# Altium PCB PCB1.PcbDoc
Units mm, origin at the board's own origin, x right, y up, seen from the top; angles counter-clockwise.
Board outline 85 x 56 mm, 4 copper layers (Top Layer, GND, +3V3, Bottom Layer), stack 0.568 mm thick; 80 components, 57 nets, 316 pads, 13 vias.
Unrouted connection lines stored in the file: 178.
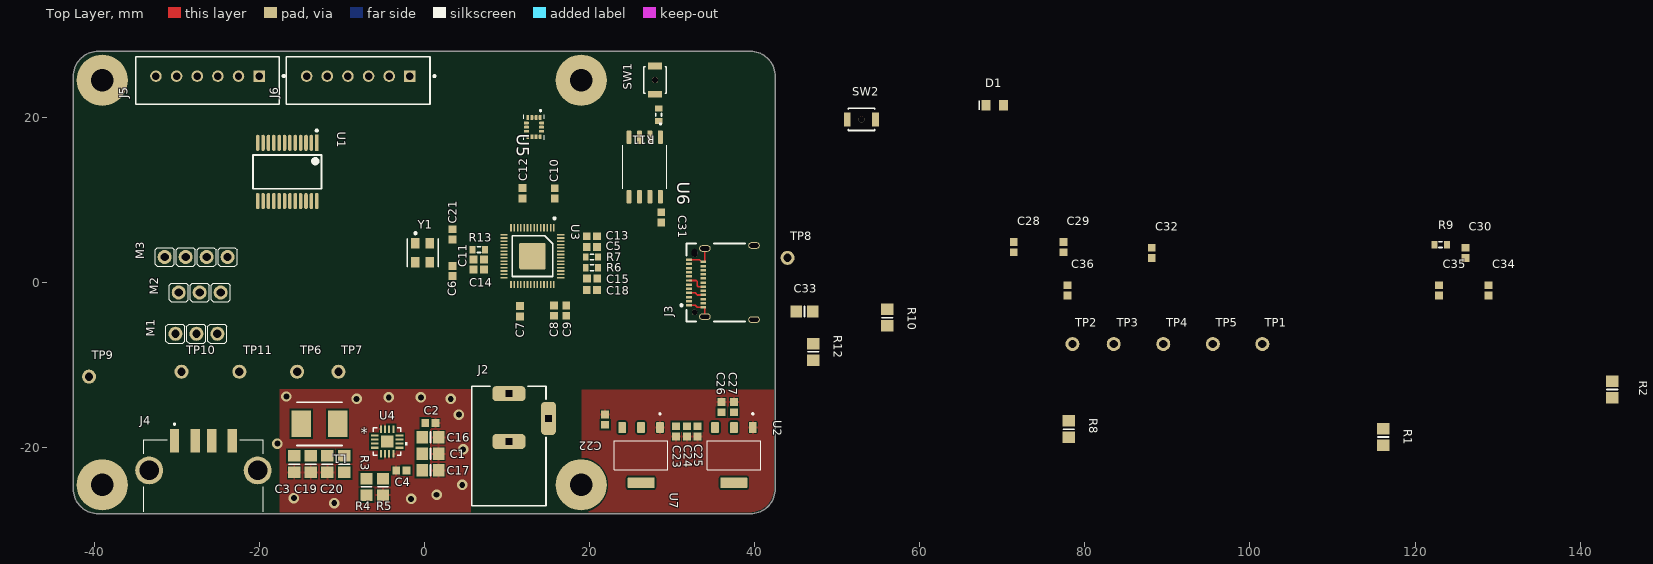
[diagram p0: Top Layer view]
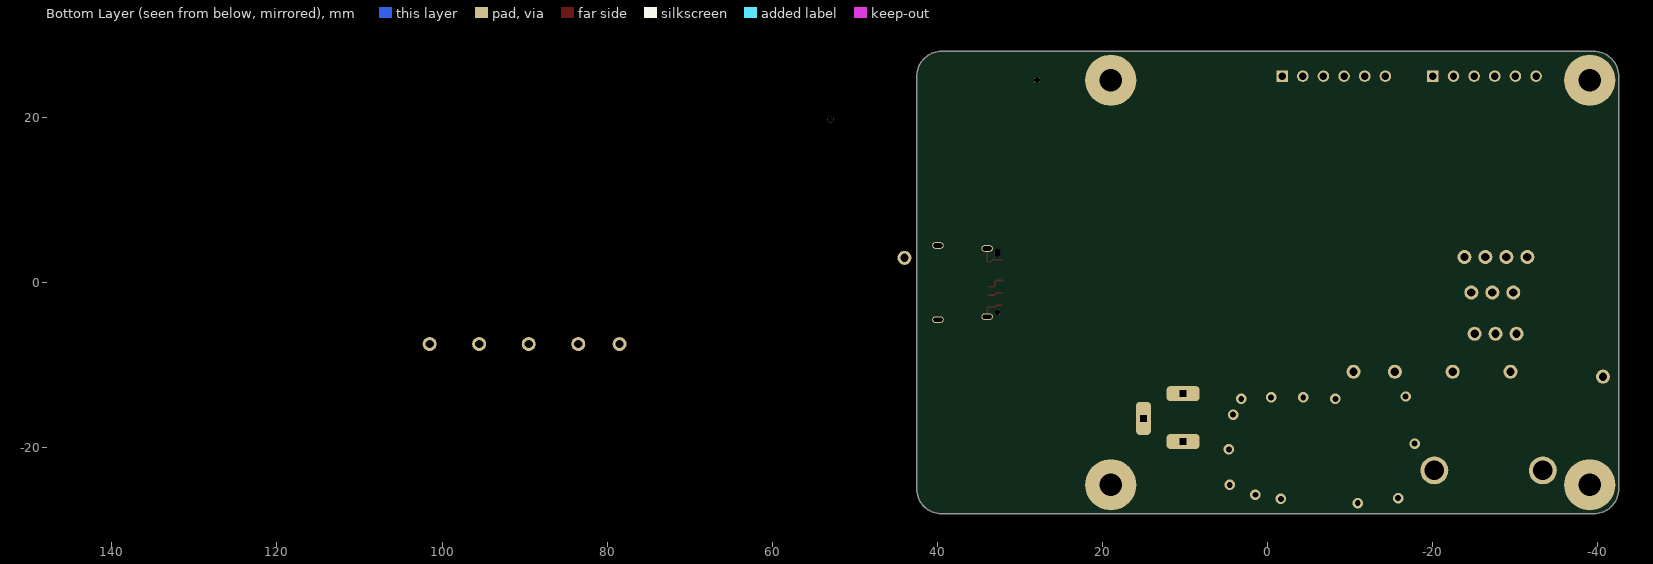
[diagram p1: Bottom Layer view, seen from below]
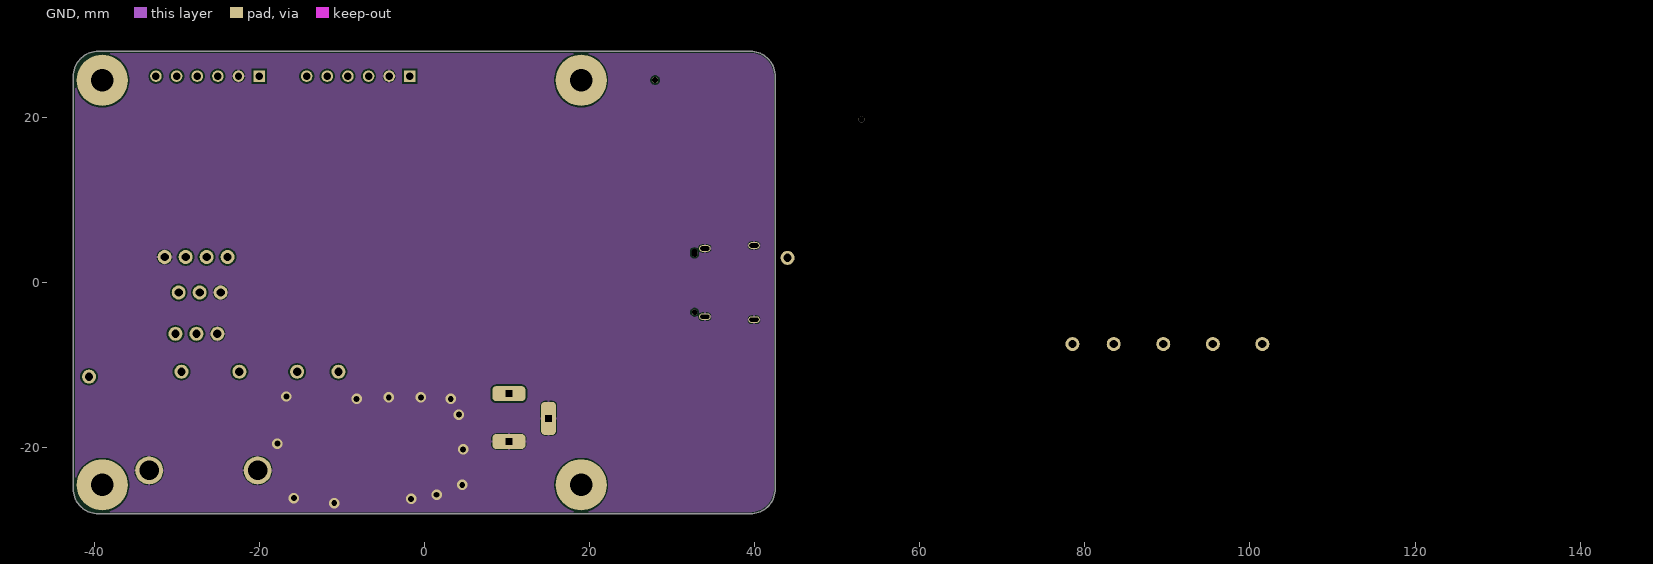
[diagram p2: GND]
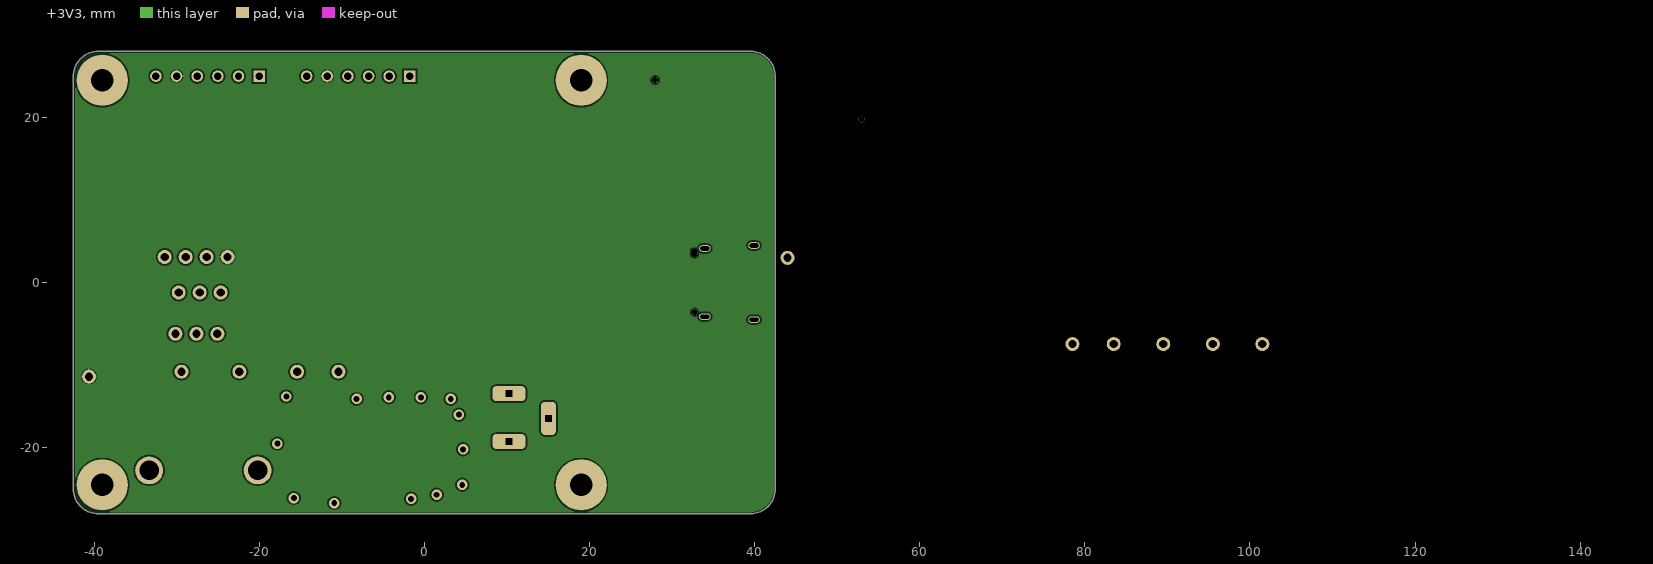
[diagram p3: +3V3]

## Layer stack, top to bottom
Top Solder: solder mask 0.0102, Solder Resist, Dk 3.5
Top Layer: signal copper 0.0356
Dielectric 2: prepreg 0.0711, PP-006, Dk 4.1
GND: signal copper 0.0175
Dielectric 1: dielectric 0.32, FR-4, Dk 4.8
+3V3: signal copper 0.0175
Dielectric 3: prepreg 0.0711, PP-006, Dk 4.1
Bottom Layer: signal copper 0.0356
Bottom Solder: solder mask 0.0102, Solder Resist, Dk 3.5

## Board outline
-42.5,-25 -42.5,25 cw(c-39.5,25) -39.5,28 39.5,28 cw(c39.5,25) 42.5,25 42.5,-25 cw(c39.5,-25) 39.5,-28 -39.5,-28 cw(c-39.5,-25)

## Design rules (kind name [scope] priority, off if disabled: settings)
BoardOutlineClearance [All] p1: gap=0.2 ignorepadtopadclearanceinfootprint=FALSE
Clearance [All] p1: gap=0.2 ignorepadtopadclearanceinfootprint=TRUE except(0: Arc-Text Arc-Hole Track-Text Track-Hole SMDPad-Text SMDPad-Hole THPad-Text THPad-Hole Via-Text Via-Hole Fill-Text Fill-Hole Poly-Text Poly-Hole Region-Text Region-Hole Text-Text Text-Hole; 0.1: Arc-Arc Arc-Track Track-Track)
DiffPairsRouting [All] p1: maxlimit=0.254 minlimit=0.254 mostfreqgap=0.254 toplayer_minwidth=0.381 toplayer_maxwidth=0.381 toplayer_prefwidth=0.381 midlayer1_minwidth=0.381 midlayer1_maxwidth=0.381 midlayer1_prefwidth=0.381 midlayer2_minwidth=0.381 midlayer2_maxwidth=0.381 midlayer2_prefwidth=0.381 bottomlayer_minwidth=0.381 bottomlayer_maxwidth=0.381 bottomlayer_prefwidth=0.381 maxuncoupledlength=12.7
HoleSize [All] p1: absolutevalues=TRUE maxlimit=6.3 minlimit=0.3 maxpercent=80.000 minpercent=20.000
MinimumAnnularRing [All] p1: minimumring=0.13
MinimumSolderMaskSliver [All] p1: minsoldermaskwidth=0.098
PolygonConnect "PTH-M3 Connect" [All vs HasFootprint('PTH-M3')] p1: connectstyle=Direct reliefconductorwidth=0.254 reliefentries=4 polygonreliefangle="90 Angle" airgapwidth=0.254
PolygonConnect [All] p2: thpad.connectstyle=Relief thpad.reliefconductorwidth=0.3 thpad.reliefentries=4 thpad.polygonreliefangle="90 Angle" thpad.airgapwidth=0.1 smdpad.connectstyle=Relief smdpad.reliefconductorwidth=0.3 smdpad.reliefentries=4 smdpad.polygonreliefangle="90 Angle" smdpad.airgapwidth=0.1 via.connectstyle=Direct via.reliefconductorwidth=0.254 via.reliefentries=4 via.polygonreliefangle="90 Angle" via.airgapwidth=0.254
RoomDefinition "board schematic" [InComponentClass('board schematic')] p1: confinementstyle=ConfineIn formatcopy=TRUE lockcomponents=FALSE outline -57,-28 561,-28 561,35 -57,35
RoutingVias [All] p1: holewidth=0.3 width=0.6 viastyle="Through Hole" minholewidth=0.3 minwidth=0.45 maxholewidth=6.35 maxwidth=3
SilkToSilkClearance [All] p1: silktosilkclearance=0.1
SilkToSolderMaskClearance [IsPad] p1: minsilkscreentomaskgap=0 clearancetoexposedcopper=TRUE
SolderMaskExpansion "Tent Vias" [IsVia] p1: expansion=0.102 istentingtop=TRUE
SolderMaskExpansion [All] p2: expansion=0.038 istentingtop=FALSE
Width PowerNets [InNetClass('PowerNets')] p1: maxlimit=0.5 minlimit=0.2 preferedwidth=0.2 minimp=50.000000 maximp=50.000000 favimp=50.000000
Width [All] p2: maxlimit=2 minlimit=0.1 preferedwidth=0.2 minimp=50.000000 maximp=50.000000 favimp=50.000000
25 further rules are at their usual default settings.

## Classes and differential pairs
differential pair USB_D: +USB_D_P -USB_D_N

## Components (designator, comment, footprint, x,y, rotation, side; value= is the part's Value field where it differs from the comment)
C1 "10u L" 6-0805_M 0.75,-20.75 r180 top
C2 "0.1u" "CAP 0603" 0.75,-17 r180 top
C3 "47u" 6-0805_M -15.75,-22 r90 top
C4 "0.1u" "CAP 0603" -2.775,-22.75 r180 top
C5 "0.1u" "CAP 0603" 20.3,4.3 r180 top
C6 "15p" "CAP 0603" 3.4,1.4 r90 top
C7 "0.1u" "CAP 0603" 11.6,-3.475 r90 top
C8 "0.1u" "CAP 0603" 15.7,-3.4 r90 top
C9 "0.1u" "CAP 0603" 17.2,-3.4 r90 top
C10 "0.1u" "CAP 0603" 15.8,10.8 r270 top
C11 "0.1u" "CAP 0603" 6.6,2.8 r0 top
C12 "0.1u" "CAP 0603" 11.9,10.825 r270 top
C13 "0.1u" "CAP 0603" 20.3,5.6 r180 top
C14 "0.1u" "CAP 0603" 6.6,1.6 r0 top
C15 "1u" "CAP 0603" 20.325,0.5 r180 top
C16 "10u L" 6-0805_M 0.75,-18.75 r180 top
C17 "10u L" 6-0805_M 0.75,-22.75 r180 top
C18 "1u" "CAP 0603" 20.3,-0.9 r180 top
C19 "47u" 6-0805_M -13.75,-22 r90 top
C20 "47u" 6-0805_M -11.75,-22 r90 top
C21 "15p" "CAP 0603" 3.4,5.825 r270 top
C22 "10u" "CAP 0603" 21.9,-16.6 r270 top
C23 "10u" "CAP 0603" 30.5,-18.025 r90 top
C24 "10u" "CAP 0603" 31.8,-18.025 r90 top
C25 "10u" "CAP 0603" 33.1,-18.025 r90 top
C26 "10u" "CAP 0603" 36,-15.075 r270 top
C27 "10u" "CAP 0603" 37.5,-15.075 r270 top
C28 "0.1u" "CAP 0603" 71.4,4.3 r90 top
C29 "10u" "CAP 0603" 77.4,4.3 r90 top
C30 "0.1u" "CAP 0603" 126.1,3.6 r90 top
C31 "0.1u" "CAP 0603" 28.7,7.9 r270 top
C32 "0.1u" "CAP 0603" 88.1,3.6 r90 top
C33 "10u L" 6-0805_M 46.05,-3.5 r180 top
C34 "2.2u" "CAP 0603" 128.9,-0.95 r90 top
C35 "0.1u" "CAP 0603" 122.9,-0.95 r90 top
C36 "10u" "CAP 0603" 77.9,-0.95 r90 top
D1 "150080VS75000" WL-SMCW_0805_150080xx75000 69.1,21.475 r0 top
J2 "Barrel jack" 694106301002 10.25,-19.8 r0 top
J3 "YS" FP-12401610E4#2A-MFG 37.1,0 r90 top
J4 "USB A" AMPHENOL_87583-2010RPLF -26.75,-22.75 r0 top
J5 "B6B-XH-A(LF)(SN)" FP-B6B-XH-A_LF_SN-MFG -26.25,24.475 r180 top
J6 "B6B-XH-A(LF)(SN)" FP-B6B-XH-A_LF_SN-MFG -8,24.475 r180 top
L1 "2.2uH" INDPM5552X300N -12.7,-17.1 r180 top
M1 "Servo1" "3 PIN THT" -25.06,-6.2 r180 top
M2 "Servo2" "3 PIN THT" -24.66,-1.2 r180 top
M3 "Sonic" "4 PIN THT - DUPLICATE" -23.82,3.1 r180 top
R1 "5k1" 6-0805_M 116.15,-18.7 r90 top
R2 "5k1" 6-0805_M 143.9,-12.95 r90 top
R3 "100k" 6-0805_M -9.7,-22 r90 top
R4 "270k" 6-0805_M -7,-24.75 r90 top
R5 "51k" 6-0805_M -5,-24.75 r90 top
R6 "27.4" J1-0603 20.3,1.8 r0 top
R7 "27.4" J1-0603 20.3,3.1 r0 top
R8 "270k" 6-0805_M 78.05,-17.75 r90 top
R9 "1k" J1-0603 123.1,4.6 r0 top
R10 "51k" 6-0805_M 56.05,-4.25 r90 top
R11 "1k" J1-0603 28.375,20.325 r270 top
R12 "51k" 6-0805_M 47.1,-8.4 r90 top
R13 "1k" J1-0603 6.6,4 r0 top
SW1 "B3U-1000P-B" FP-B3U-1000P-B-MFG 27.95,24.525 r90 top
SW2 "B3U-1000P-B" FP-B3U-1000P-B-MFG 52.95,19.775 r0 top
TP1 "TP" "TP THROUGH" 101.5,-7.45 r0 top
TP2 "TP" "TP THROUGH" 78.5,-7.45 r90 top
TP3 "TP" "TP THROUGH" 83.5,-7.45 r90 top
TP4 "TP" "TP THROUGH" 89.5,-7.45 r90 top
TP5 "TP" "TP THROUGH" 95.5,-7.45 r90 top
TP6 "TP" "TP THROUGH" -15.4,-10.8 r90 top
TP7 "TP" "TP THROUGH" -10.4,-10.8 r90 top
TP8 "TP" "TP THROUGH" 44,3 r90 top
TP9 "TP" "TP THROUGH" -40.6,-11.4 r90 top
TP10 "TP" "TP THROUGH" -29.4,-10.8 r90 top
TP11 "TP" "TP THROUGH" -22.4,-10.8 r90 top
U1 "TB6612FNG,C,8,EL" FP-SSOP24-P-300-0_65A-IPC_A -16.6,13.4 r270 top
U2 "AMS11173v3" SOT229P700X180-4N 37.5,-20.9 r270 top
U3 "RP2040" QFN-56-GP 13.1,3.2 r270 top
U4 "BD9D300MUV-E2" VQFN16_BD9D300_ROM-M -4.5,-19.251 r0 top
U5 "ICM-42688-P" PQFN50P300X250X97-14N 13.285,18.825 r270 top
U6 "W25Q128JVSIQ" SOIC127P790X216-8N 26.7,14 r270 top
U7 "AMS1117 5V" SOT229P700X180-4N 26.25,-20.9 r270 top
Y1 "ABM8-12.000MHZ-B2-T" FP-ABM8-MFG -0.2,3.6 r270 top

## Footprints (in the part's own frame and the unit in brackets; to place one, negate y for a bottom-side part, rotate by r counter-clockwise, add the part's x,y. Pads: shape width x height; smd on the part's side, far side on the other; paste and mask are expansions set on the pad)
"3 PIN THT" [mm] "3 pin servo"
  round 1.7 hole 1 paste-1000 mask+0: 1(0,0) 2(2.54,0) 3(5.08,0)
  silkscreen extent -1.14,-1.14 6.22,1.14
"4 PIN THT - DUPLICATE" [mm] "4 pin THT"
  round 1.7 hole 1 paste-1000 mask+0: 1(0,0) 2(2.54,0) 3(5.08,0) 4(7.62,0)
  silkscreen extent -1.14,-1.14 8.76,1.14
6-0805_M [mm] "Chip Resistor, Body 2.0x1.2mm, IPC Low Density"
  rect 1.4x1.5 smd: 1(-1,0) 2(1,0)
  silkscreen extent 0,-0.65 0,0.65, body extent -1.07,-0.7 1.07,0.7, height 0.7
694106301002 [mm] "DC Power Jack Right Angled(6.4)"
  rrect50% 4x1.8 hole 0.8 square: 1(0,6.35) 2(0,0.55)
  rrect50% 1.8x4 hole 0.8 square: 3(4.8,3.35)
  silkscreen extent -4.5,-7.25 4.5,7.25, body extent -4.5,-7.25 5,7.25, height 10.75
AMPHENOL_87583-2010RPLF [mm]
  rect 1.12x2.88 smd: 01(-3.5,3.58) 02(-1,3.58) 03(1,3.58) 04(3.5,3.58)
  round 3.376 hole 2.36: S1(-6.57,0) S2(6.57,0)
  silkscreen extent -7.25,-5 7.25,5.7, body extent -7.25,-10.28 7.25,4.6, height 7.74
"CAP 0603" [mm] "Chip Capacitor, 2-Leads, Body 1.70x0.90mm, IPC Medium Density"
  rect 0.95x0.95 smd: 1(-0.625,0) 2(0.625,0)
  body extent -0.85,-0.45 0.85,0.45, height 0.9
FP-12401610E4#2A-MFG [mm]
  rrect100% 0.8x1.4 hole 1.1 slot 0.5 at 0 deg paste-1000 mask+0: 1(-4.13,3.115) 2(4.13,3.115) 3(-4.49,-2.835) 4(4.49,-2.835)
  rect 0.3x0.7 smd paste+0 mask+0: A1(-2.75,5.025) A2(-2.25,5.025) A3(-1.75,5.025) A4(-1.25,5.025) A5(-0.75,5.025) A6(-0.25,5.025) A7(0.25,5.025) A8(0.75,5.025) A9(1.25,5.025) A10(1.75,5.025) A11(2.25,5.025) A12(2.75,5.025) B1(2.5,3.325) B2(2,3.325) B3(1.5,3.325) B4(1,3.325) B5(0.5,3.325) B6(0,3.325) B7(-0.5,3.325) B8(-1,3.325) B9(-1.5,3.325) B10(-2,3.325) B11(-2.5,3.325) B12(-3,3.325)
  round 0.65 hole 0.65 unplated paste-1000 mask+0: ""(-3.6,4.365)
  rrect100% 0.95x0.65 hole 0.65 slot 0.95 at 0 deg unplated paste-1000 mask+0: ""(3.6,4.365)
  silkscreen extent -4.72,-1.76 4.72,6.09, body extent -4.99,-5.45 4.99,5.48, height 0.25
FP-ABM8-MFG [mm]
  rect 1.3x1.05 smd paste+0 mask+0: 1(-1.15,-0.875) 2(1.15,-0.875) 3(1.15,0.875) 4(-1.15,0.875)
  silkscreen extent -2.5,-1.88 1.7,1.88, body extent -1.9,-1.5 1.9,1.5, height 0.25
FP-B3U-1000P-B-MFG [mm]
  rect 0.8x1.7 smd paste+0 mask+0: 1(-1.7,0) 2(1.7,0)
  round 0.75 hole 0.75 unplated paste-1000 mask+0: ""(0,0)
  silkscreen extent -1.6,-1.35 1.6,1.35, body extent -2.2,-1.45 2.2,1.45, height 0.25
FP-B6B-XH-A_LF_SN-MFG [mm]
  rect 1.4x1.4 hole 0.9 paste-1000 mask+0: 1(-6.25,-0.525)
  round 1.4 hole 0.9 paste-1000 mask+0: 2(-3.75,-0.525) 3(-1.25,-0.525) 4(1.25,-0.525) 5(3.75,-0.525) 6(6.25,-0.525)
  silkscreen extent -9.35,-2.88 8.7,2.88, body extent -8.8,-2.98 8.8,2.98, height 0.25
FP-SSOP24-P-300-0_65A-IPC_A [mm]
  rect 1.954x0.432 smd paste+0 mask+0: 1(-3.525,3.575)
  rrect100% 1.954x0.432 smd paste+0 mask+0: 2(-3.525,2.925) 3(-3.525,2.275) 4(-3.525,1.625) 5(-3.525,0.975) 6(-3.525,0.325) 7(-3.525,-0.325) 8(-3.525,-0.975) 9(-3.525,-1.625) 10(-3.525,-2.275) 11(-3.525,-2.925) 12(-3.525,-3.575) 13(3.525,-3.575) 14(3.525,-2.925) 15(3.525,-2.275) 16(3.525,-1.625) 17(3.525,-0.975) 18(3.525,-0.325) 19(3.525,0.325) 20(3.525,0.975) 21(3.525,1.625) 22(3.525,2.275) 23(3.525,2.925) 24(3.525,3.575)
  silkscreen extent -5.13,-4.15 2.05,4.15, body extent -5,-4.65 5,4.65, height 0.25
INDPM5552X300N [mm]
  rect 2.35x3.2 smd: 1(-2.2,0) 2(2.2,0)
  silkscreen extent -2.75,-2.63 2.75,2.63
J1-0603 [mm] "Chip Resistor, Body 1.6x0.8mm, IPC High Density"
  rect 0.7x0.9 smd: 1(-0.75,0) 2(0.75,0)
  silkscreen extent -0.2,-0.35 0.2,0.35, body extent -0.85,-0.48 0.85,0.48, height 0.9
PQFN50P300X250X97-14N [mm]
  rrect50% 0.59x0.35 smd mask+0: 1(-1.165,0.75) 2(-1.165,0.25) 3(-1.165,-0.25) 4(-1.165,-0.75) 8(1.165,-0.75) 9(1.165,-0.25) 10(1.165,0.25) 11(1.165,0.75)
  rrect50% 0.35x0.59 smd mask+0: 5(-0.5,-0.915) 6(0,-0.915) 7(0.5,-0.915) 12(0.5,0.915) 13(0,0.915) 14(-0.5,0.915)
  silkscreen extent -2.1,-1.25 1.5,1.25, body extent -1.5,-1.25 1.5,1.25, height 0.98
QFN-56-GP [mm]
  rect 0.875x0.2 smd mask+0.05: 1(-3.437,2.6) 2(-3.437,2.2) 3(-3.437,1.8) 4(-3.437,1.4) 5(-3.437,1) 6(-3.437,0.6) 7(-3.437,0.2) 8(-3.437,-0.2) 9(-3.437,-0.6) 10(-3.437,-1) 11(-3.437,-1.4) 12(-3.437,-1.8) 13(-3.437,-2.2) 14(-3.437,-2.6) 29(3.437,-2.6) 30(3.437,-2.2) 31(3.437,-1.8) 32(3.437,-1.4) 33(3.437,-1) 34(3.437,-0.6) 35(3.437,-0.2) 36(3.437,0.2) 37(3.437,0.6) 38(3.437,1) 39(3.437,1.4) 40(3.437,1.8) 41(3.437,2.2) 42(3.437,2.6)
  rect 0.2x0.875 smd mask+0.05: 15(-2.6,-3.437) 16(-2.2,-3.437) 17(-1.8,-3.437) 18(-1.4,-3.437) 19(-1,-3.437) 20(-0.6,-3.437) 21(-0.2,-3.437) 22(0.2,-3.437) 23(0.6,-3.437) 24(1,-3.437) 25(1.4,-3.437) 26(1.8,-3.437) 27(2.2,-3.437) 28(2.6,-3.437) 43(2.6,3.437) 44(2.2,3.437) 45(1.8,3.437) 46(1.4,3.437) 47(1,3.437) 48(0.6,3.437) 49(0.2,3.437) 50(-0.2,3.437) 51(-0.6,3.437) 52(-1,3.437) 53(-1.4,3.437) 54(-1.8,3.437) 55(-2.2,3.437) 56(-2.6,3.437)
  rrect10% 3.2x3.2 smd paste-1000 mask+0: 57(0,0)
  silkscreen extent -4.7,-2.46 2.46,2.79, body extent -3.52,-3.52 3.52,3.52, height 0.91
SOIC127P790X216-8N [mm]
  rrect25% 1.61x0.58 smd: 1(-3.605,1.905) 2(-3.605,0.635) 3(-3.605,-0.635) 4(-3.605,-1.905) 5(3.605,-1.905) 6(3.605,-0.635) 7(3.605,0.635) 8(3.605,1.905)
  silkscreen extent -5.31,-2.64 2.64,2.64, body extent -3.95,-2.64 3.95,2.64, height 1.92
SOT229P700X180-4N [mm]
  rrect15% 1.31x0.93 smd: 1(-3.345,2.29) 2(-3.345,0) 3(-3.345,-2.29)
  rrect15% 1.31x3.24 smd: 4(3.345,0)
  silkscreen extent -5.1,-3.25 1.75,3.25, body extent -3.5,-3.25 3.5,3.25, height 1.8
"TP THROUGH" [mm]
  round 1.7 hole 1 paste-1000 mask+0: 1(0,0)
VQFN16_BD9D300_ROM-M [mil]
  rect 36x10 smd paste+0 mask+0: 1(-59,29.54) 2(-59,9.85) 3(-59,-9.84) 4(-59,-29.53) 9(59,-29.53) 10(59,-9.84) 11(59,9.85) 12(59,29.54)
  rect 10x36 smd paste+0 mask+0: 5(-29.53,-59) 6(-9.84,-59) 7(9.85,-59) 8(29.54,-59) 13(29.54,59) 14(9.85,59) 15(-9.84,59) 16(-29.53,59)
  rect 59x59 smd paste+0 mask+0: 17(0,0)
  silkscreen extent -66,-66 97,66, body extent -61,-61 61,61, height 39
WL-SMCW_0805_150080xx75000 [mm] "SMD Mono-color Chip LED, body 2.0x1.25mm"
  rect 1.1x1.3 smd: 1(-1.05,0) 2(1.05,0)
  silkscreen extent -2,-0.6 -1.8,0.6, body extent -1,-0.63 1,0.62, height 0.7

## Part data
C1 C16 C17 C33: library part "Capacitor 10 uf 0805", "Capacitor 10 uf 0805", Creator="Gabriel de Leon"
C2 C4 C5 C7 C8 C9 C10 C11 C12 C13 C14 C28 C30 C31 C32 C35: library part "Capacitor 0.1 uf 0603", "Capacitor 0.1 uf 0603", Creator="Gabriel de Leon"
C3 C19 C20: library part "Capacitor 47uF 1206", "Capacitor 47uF 1206", Creator="Gabriel de Leon"
C6 C21: library part "Capacitor 15 pf 0603", "Capacitor 15 pf 0603", Creator="Gabriel de Leon"
C15 C18: library part "Capacitor 1 uf 0603", "Capacitor 0.1 uf 0603", Creator="Gabriel de Leon"
C22 C23 C24 C25 C26 C27 C29 C36: library part "Capacitor 10 uf 0603", "Capacitor 10 uf 0603", Creator="Gabriel de Leon"
C34: library part "Capacitor 2.2 uf 0603", "Capacitor 2.2 uf 0603", Creator="Gabriel de Leon"
D1: library part CMP-1426-00009-5, Case Code (Imperial)=0805, Case Code (Metric)=2012, Color=Green, Forward Current=100mA, Forward Voltage=2V, Max Junction Temperature (Tj)=95°C, Max Operating Temperature=85°C, Max Reverse Voltage (DC)=5V, Min Operating Temperature=-40°C, Power Dissipation=72mW, Test Current=20mA, Case/Package=0805, Dominant Wavelength=570nm, Height=700µm, Length=2mm, Lens Style="Clear, Rectangular", Luminous Intensity=40mcd, Mount="Surface Mount", NexarPartId=29717783, Packaging="Tape and Reel", Peak Wavelength=572nm, REACH SVHC=Unknown, Reverse Voltage=5V, RoHS=Compliant, Viewing Angle=140°, Wavelength=570nm, Width=1.25mm
J2: library part CMP-1502-00188-2, Color=Black, Current Rating=5A, Flammability Rating="UL94 V-0", Insulation Resistance=100MΩ, Max Operating Temperature=85°C, Min Operating Temperature=-40°C, Operating Supply Voltage=24V, Voltage Rating (DC)=20V, Connector Type=Power, Contact Gender=Female, Contact Material="Gold, Tin", Contact Plating=Tin, Gender=Male, Height=11mm, Housing Material=Polyamide, Mount="Through Hole", NexarPartId=52676100, Number of Contacts=3, Packaging=Bulk, REACH SVHC=Unknown, RoHS=Compliant, Shielding=Unshielded, Termination="Through Hole", Voltage Rating=24V
J3: library part "USB Type C altium", "CONN RCP USB3.1 TYPEC 24P SMD RA", Connector Type=USB, Gender=Receptacle, Mount="Surface Mount", Number of Contacts=24, Number of Pins=24, Packaging="Cut Tape"
J4: library part "USB type A F", "Usb type A female", Package=None, Availability=Unavailable, MF="Amphenol ICC", MP=87583-2010RPLF, Price=None
J5 J6: library part CMP-17439-000076-1, "CONN HEADER VERT 6POS 2.5MM"
L1: library part inductor, "Inductor"
M1 M2: library part Servo, "Servo conncetion"
M3: "Sonic sensor"
R1 R2: library part "5k1 resistor", "5.1k resistor 0805", LatestRevisionDate=29-May-2009, LatestRevisionNote="IPC-7351 Footprint Added.", PackageDescription="Chip Resistor", PackageReference=J1-0603, Published=8-Jun-2000, Publisher="Altium Limited"
R3: library part "100k resistor", "100k resistor", LatestRevisionDate=29-May-2009, LatestRevisionNote="IPC-7351 Footprint Added.", PackageDescription="Chip Resistor", PackageReference=J1-0603, Published=8-Jun-2000, Publisher="Altium Limited"
R4 R8: library part "270k resistor", "270k 0805 resistor", LatestRevisionDate=29-May-2009, LatestRevisionNote="IPC-7351 Footprint Added.", PackageDescription="Chip Resistor", PackageReference=J1-0603, Published=8-Jun-2000, Publisher="Altium Limited"
R5 R10 R12: library part "51k resistor", "51k resistor", LatestRevisionDate=29-May-2009, LatestRevisionNote="IPC-7351 Footprint Added.", PackageDescription="Chip Resistor", PackageReference=J1-0603, Published=8-Jun-2000, Publisher="Altium Limited"
R6 R7: library part "27.4 resistor", "27.4 Resistor", LatestRevisionDate=29-May-2009, LatestRevisionNote="IPC-7351 Footprint Added.", PackageDescription="Chip Resistor", PackageReference=J1-0603, Published=8-Jun-2000, Publisher="Altium Limited"
R9 R11 R13: library part "1k resistor", "Resistor", LatestRevisionDate=29-May-2009, LatestRevisionNote="IPC-7351 Footprint Added.", PackageDescription="Chip Resistor", PackageReference=J1-0603, Published=8-Jun-2000, Publisher="Altium Limited"
SW1 SW2: library part CMP-08834-000005-1, "SWITCH TACTILE SPST-NO 0.05A 12V", Ambient Temperature Range High=+70°C, Ambient Temperature Range Low=-25°C, Contact Current Rating=50mA, Contact Resistance=100mΩ, Manufacturer=Omron, Operating Force=1.5N, Package=0, Temperature="-25°C to +70°C", Voltage Rating Dc=12V, Automotive=No, Category=Switch, ComponentLink2Description=Datasheet, ComponentLink2URL=https://omronfs.omron.com/en_US/ecb/products/pdf/en-b3u.pdf, Device Class L1=Electromechanical, Device Class L2=Switches, Device Class L3="Tactile Switches", Digikey Description="SWITCH TACTILE SPST-NO 0.05A 12V", Electromechanical Life=200000Cycles, Height=1.75mm, Lead Free=Yes, Manufacturer Part Number=B3U-1000P-B, Mount="Surface Mount", Mouser Description="Tactile Switches Top Actuated with boss w/o ground", Octopart=https://octopart.com/b3u-1000p-b-omron-1057356, RoHS=TRUE, Temperature Range High=+70°C, Temperature Range Low=-25°C, Throw Configuration=SPST-NO
TP1 TP2 TP3 TP4 TP5 TP6 TP7 TP8 TP9 TP10 TP11: library part Testpoint
U1: library part TB6612FNG, "IC MOTOR DRIVER 2.7V-5.5V 24SSOP", Case/Package=SSOP, Max Operating Temperature=85°C, Max Supply Voltage=5.5V, Min Operating Temperature=-20°C, Min Supply Voltage=2.7V, Operating Supply Voltage=3V, Output Current=1A, Package Quantity=1, Interface=Parallel, Logic Function="AND GATE", Mount="Surface Mount", Number of Outputs=2, Number of Pins=24, Packaging="Tape and Reel", Series=-
U2: library part AMS1117_3V3, "3.3v version of AMS11173v3"
U3: "Rasberry pi PR2040", Manufacturer="Raspberry Pi", Creater="Gabriel de Leon", Manufacturer Part Number=RP2040
U4: "Switching regualtor 3A 4.7v to 14V", Mfr_Name="ROHM Semiconductor", RefDes=RefDes, Type=Type
U5: "Accelerometer, Gyroscope, 6 Axis Sensor Output", Package=None, Availability=Unavailable, MP=ICM-42688-P, Price=None
U6: "FLASH - NOR Memory IC 128Mb (16M x 8) SPI - Quad I/O, QPI, DTR 133 MHz 8-SOIC", Package="SOIC-8 Winbond", Availability="In Stock", Check_prices=https://www.snapeda.com/parts/W25Q128JVSIQ/Winbond+Electronics/view-part/?ref=eda, MF="Winbond Electronics", MP=W25Q128JVSIQ, Price=None, Purchase-URL=https://pricing.snapeda.com/search/part/W25Q128JVSIQ/?ref=eda, SnapEDA_Link=https://www.snapeda.com/parts/W25Q128JVSIQ/Winbond+Electronics/view-part/?ref=snap
U7: library part AMS1117_5V, "5V version of AMS11173"
Y1: library part CMP-27762-003220-1, "Crystal 12MHz ±20ppm 18pF SMD-4 3.2mm x 2.5mm", Case/Package=CSMD, ESR (Equivalent Series Resistance)=120R, Frequency=12MHz, Frequency Stability=50ppm, Frequency Tolerance=20ppm, Load Capacitance=18pF, Max Operating Temperature=70°C, Min Operating Temperature=-20°C, Operating Frequency="12 MHz", Package Quantity=1000, Resistor Type=Ceramic, Depth=2.5mm, Height=0.031inch, Lead Free="Lead Free", Length=3.2mm, Mount="Surface Mount", Number of Pins=4, Packaging="Tape and Reel", Radiation Hardening=No, REACH SVHC="No SVHC", RoHS Compliant=Yes, Series=ABM8, Series Resistance=120R, Termination=SMD/SMT, Tolerance=20ppm, Width=0.098inch

## Free pads (board coordinates)
  round 6.2 hole 2.75 paste-1000 mask+0: 64(-39,24.5) 65(19,24.5) 66(-39,-24.5) 67(19,-24.5)

## Via types
v1: diameter 1.27, hole 0.711, Top Layer to Bottom Layer, tented both sides, 13 vias

## Nets (pads, with @x,y where several pads share a name; then routed paths per layer and width w, separated by ;. In a path a pad name is that pad's centre, name@x,y a point inside that pad or via, vN(x,y) a via of type N, cw(c..) or ccw(c..) an arc to the next point about the centre after c; other vN are vias at no path point)
+3V3: C5.2 C7.2 C8.2 C9.2 C10.2 C11.2 C12.2 C18.2 C26.2 C27.2 C28.2 C29.2 C31.1 C34.2 C35.2 J5.5 J6.5 M3.1 R12.1 TP9.1 U1.20 U2.2 U3.1 U3.10 U3.22 U3.33 U3.42 U3.43 U3.44 U3.48 U3.49 U5.8 U6.8
+5V: C23.2 C24.2 C25.2 J3.A4 J3.A9 J3.B4 J3.B9 M1.2 M2.2 TP10.1 U2.3 U7.2 | length 1.8
  Top Layer w0.2: J3.A4 32.825,-1.25 33.075,-1.5 J3.B9
AIN1: U1.21 U3.29
AIN2: U1.22 U3.30
AO1: J6.1 U1.1 U1.2
AO2: J6.6 U1.5 U1.6
BAT: C30.2 R8.2 R10.2 U3.38
BIN1: U1.17 U3.28
BIN2: U1.16 U3.27
BO1: J5.1 U1.11 U1.12
BO2: J5.6 U1.7 U1.8
CSn: TP1.1 U3.3 U5.12
Echo: M3.3 U3.12
GND: C1.1 C2.1 C3.1 C4.2 C5.1 C6.1 C7.1 C8.1 C9.1 C10.1 C11.1 C12.1 C13.1 C14.1 C15.1 C16.1 C17.1 C18.1 C19.1 C20.1 C21.1 C22.1 C23.1 C24.1 C25.1 C26.1 C27.1 C28.1 C29.1 C30.1 C31.2 C32.1 C33.1 C34.1 C35.1 C36.1 D1.1 J2.2 J2.3 J3.1 J3.2 J3.3 J3.4 J3.A1 J3.A12 J3.B1 J3.B12 J4.04 J4.S1 J4.S2 J5.2 J6.2 M1.1 M2.1 M3.4 R1.2 R2.2 R5.1 R10.1 SW1.2 SW2.1 TP8.1 U1.3 U1.4 U1.9 U1.10 U1.18 U2.1 U3.19 U3.57 U4.6 U4.7 U4.8 U4.15 U4.16 U4.17 U5.6 U5.9 U6.4 U7.1 Y1.2 Y1.4 | length 6.7
  Top Layer w0.2: J3.A1 32.825,-2.75 33.075,-3 J3.B12 33.935,-3 33.985,-3.05 J3.1 ; J3.A12 33.325,2.75 33.575,2.5 J3.B1 33.935,2.5 33.985,2.55 J3.2
  other v1: -10.9,-26.7 -1.6,-26.2 -15.8,-26.1 1.5,-25.7 4.6,-24.5 4.7,-20.2 -17.8,-19.5 4.2,-16 -8.2,-14.1 3.2,-14.1 -4.3,-13.9 -0.4,-13.9 -16.7,-13.8
INT: U3.9 U5.4
MA1: J6.4 U3.15
MA2: J5.4 U3.32
MB1: J6.3 U3.16
MB2: J5.3 U3.31
MISO: TP2.1 U3.2 U5.1
MOSI: TP3.1 TP5.1 U3.5 U3.6 U5.14
NetC4_1: C4.1 U4.9
NetC6_2: C6.2 Y1.3
NetC32_2: C32.2 C33.2 U1.13 U1.14
NetC36_2: C36.2 U5.5
NetD1_2: D1.2 R9.1
NetJ3_A5: J3.A5 R1.1
NetJ3_B5: J3.B5 R2.1
NetL1_1: L1.1 U4.1 U4.2 U4.3
NetR3_1: R3.1 U4.4
NetR4_1: R4.1 R5.2 U4.5
NetR4_2: R4.2 U4.14
NetR6_1: R6.1 U3.47
NetR7_1: R7.1 U3.46
NetR11_1: R11.1 SW1.1
PWMA: U1.23 U3.17
PWMB: U1.15 U3.18
QSPI_SCLK: U3.52 U6.6
QSPI_SD0: U3.53 U6.5
QSPI_SD1: U3.55 U6.2
QSPI_SD2: U3.54 U6.3
QSPI_SD3: U3.51 U6.7
QSPI_SS: R11.2 U3.56 U6.1
RUN: R12.2 SW2.2 U3.26
SCK: TP4.1 U3.4 U3.7 U5.13
SERVO1: M1.3 U3.8
SERVO2: M2.3 U3.11
SWCLK: TP6.1 U3.24
SWDIO: TP7.1 U3.25
Trig: M3.2 U3.13
USB_D_N: J3.A7 J3.B7 R7.2 | length 2.3
  Top Layer w0.2: J3.A7 32.958,0.25 33.075,0.133 33.075,-0.383 33.192,-0.5 J3.B7
USB_D_P: J3.A6 J3.B6 R6.2
VCC1V1: C13.2 C14.2 C15.2 U3.23 U3.45 U3.50
VCC5V: C3.2 C19.2 C20.2 J4.01 L1.2 R3.2 TP11.1
Vin: C1.2 C2.2 C16.2 C17.2 C22.2 J2.1 R8.1 R9.2 U1.24 U4.10 U4.11 U4.12 U7.3
XIN: C21.2 U3.20 Y1.1
XOUT: U3.21
pads on no net: J3. J3.A2 J3.A3 J3.A8 J3.A10 J3.A11 J3.B2 J3.B3 J3.B8 J3.B10 J3.B11 J4.02 J4.03 R13.1 R13.2 SW1. SW2. U1.19 U2.4 U3.14 U3.34 U3.35 U3.36 U3.37 U3.39 U3.40 U3.41 U4.13 U5.2 U5.3 U5.7 U5.10 U5.11 U7.4

## Polygon pours and split planes (outlines as drawn)
GND on GND "GND_L-01_P-001" (solid, pour order 0): -42.5,28.25 -42.75,28 -42.75,-28 42.5,-28 42.75,-27.75 42.75,28
+3V3 on +3V3 "+3v3_L-01_P-001" (solid, pour order 1): -42.75,28.5 -42.75,-28.25 -43.25,-28.75 43.5,-28.75 43.5,29
GND on Top Layer "NONET_L-01_P-001" (solid, pour order 3): -17.5,-12.9 -17.5,-27.9 5.5,-27.9 5.6,-28 5.6,-12.9
GND on Top Layer "5V_L-01_P-001" (solid, pour order 2): 42.4,-28 42.4,-13 19.1,-13 19.1,-28.2

## Silkscreen, mask and mechanical layers (free items; w line width, h text height)
Mechanical 1:
  the board outline again, w0.254

## Text inside footprints (layer, text, board x,y; h text height)
J4: Mechanical 13 "PCB EDGE" at -31,-16.25 h1.27
U4: Top Overlay "*" at -7.7,-18.8 h1.27